# Altium PCB PCB1 - Copy.PcbDoc
Units mil, origin at the board's own origin, x right, y up, seen from the top; angles counter-clockwise.
Board outline 6000 x 4000 mil, 2 copper layers (Top Layer, Bottom Layer); 3 components, 0 nets, 6 pads, 0 vias.
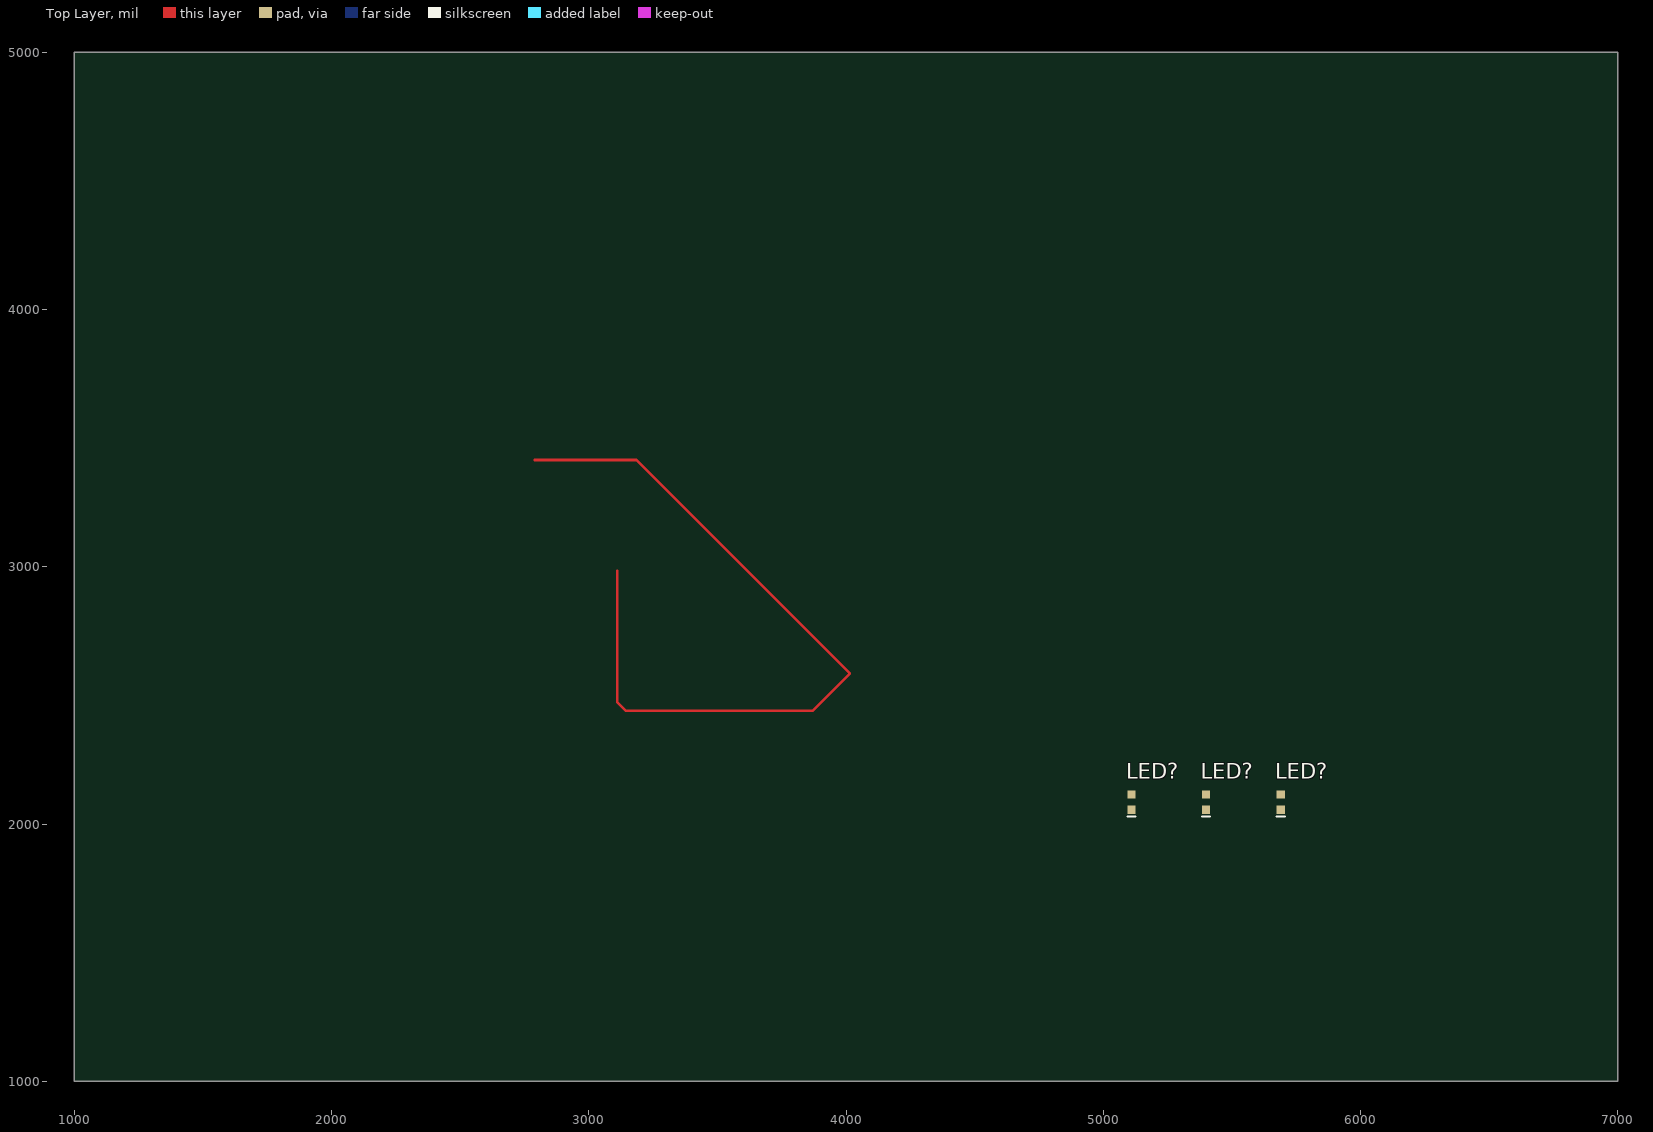
[diagram p0: Top Layer view]
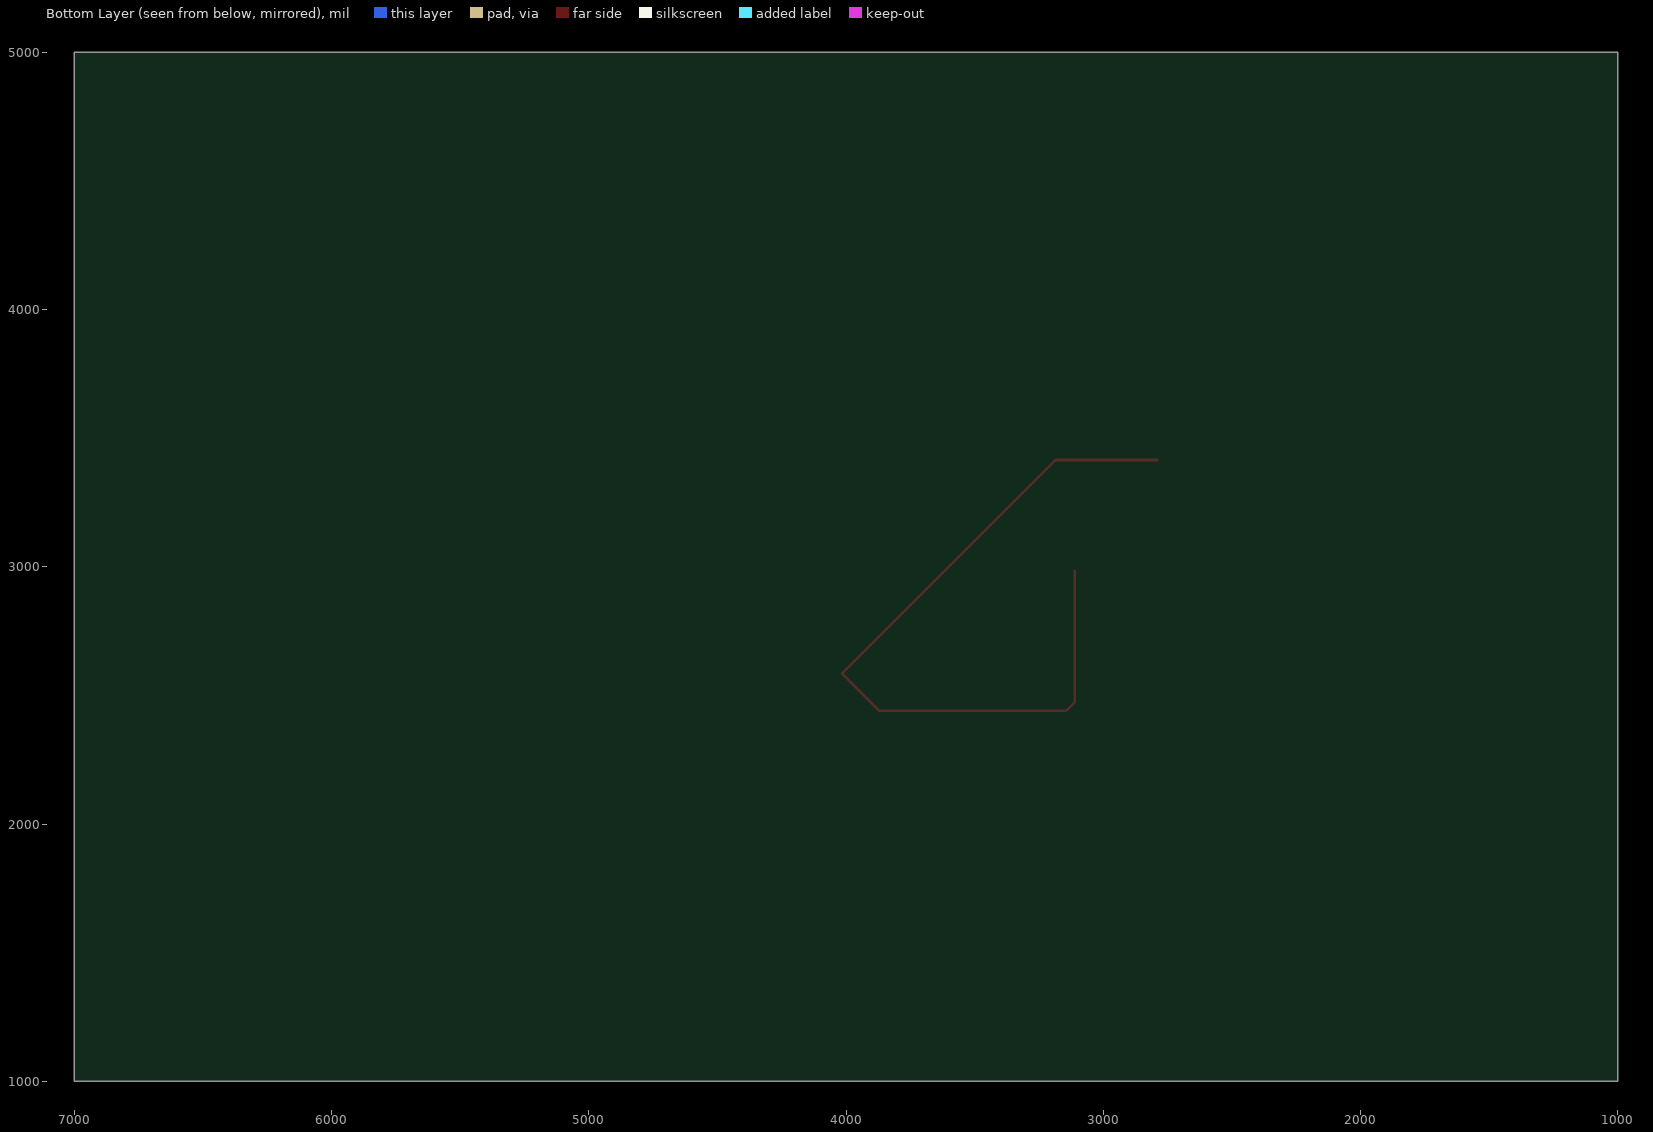
[diagram p1: Bottom Layer view, seen from below]

## Layer stack, top to bottom
Top Solder: solder mask 0.4, Solder Resist, Dk 3.5
Top Layer: signal copper 1.4
Dielectric 1: dielectric 12.6, FR-4, Dk 4.8
Bottom Layer: signal copper 1.4
Bottom Solder: solder mask 0.4, Solder Resist, Dk 3.5

## Board outline
1000,1000 7000,1000 7000,5000 1000,5000

## Design rules (kind name [scope] priority, off if disabled: settings)
Clearance [All] p1: gap=10 ignorepadtopadclearanceinfootprint=FALSE except(0: Arc-Hole Track-Hole SMDPad-Hole THPad-Hole Via-Hole Fill-Hole Poly-Hole Region-Hole Text-Hole)
PolygonConnect [All] p1: connectstyle=Relief reliefconductorwidth=10 reliefentries=4 polygonreliefangle="90 Angle" airgapwidth=10
RoomDefinition Sheet1 [InComponentClass('Sheet1')] p1: confinementstyle=ConfineIn formatcopy=TRUE lockcomponents=FALSE outline 5070,2015 5905,2015 5905,2255 5070,2255
RoutingVias [All] p1: holewidth=28 width=50 viastyle="Through Hole" minholewidth=28 minwidth=50 maxholewidth=28 maxwidth=50
SolderMaskExpansion [All] p1: expansion=4
Width [All] p1: maxlimit=10 minlimit=10 preferedwidth=10
30 further rules are at their usual default settings.

## Classes and differential pairs
component class Sheet1: LED?

## Components (designator, comment, footprint, x,y, rotation, side; value= is the part's Value field where it differs from the comment)
LED? "RED" LED0603_RED_LTST 5690,2085 r90 top
LED? "RED" LED0603_RED_LTST 5400,2085 r90 top
LED? "RED" LED0603_RED_LTST 5110,2085 r90 top

## Footprints (in the part's own frame and the unit in brackets; to place one, negate y for a bottom-side part, rotate by r counter-clockwise, add the part's x,y. Pads: shape width x height; smd on the part's side, far side on the other; paste and mask are expansions set on the pad)
LED0603_RED_LTST [mm] "Chip LED, 2-Leads, Body 1.50x0.80mm, IPC Medium Density"
  rect 0.8x0.8 smd mask+0.05: 1(-0.75,0) 2(0.75,0)
  silkscreen extent -1.4,-0.4 -1.4,0.4, body extent -0.85,-0.45 0.85,0.45, height 0.55

## Part data
LED? LED? LED?: library part E1052, "LED RED CLEAR SMD 2V 0603", OpTemp=-55~85C, Component1LinkDescription=Datasheet, Component1LinkURL=http://optoelectronics.liteon.com/upload/download/DS22-2000-223/LTST-C191KRKT.PDF, Component2LinkDescription="Supplier Part Details", Component2LinkURL=https://www.digikey.com/product-detail/en/lite-on-inc/LTST-C191KRKT/160-1447-1-ND/386836, Component Type=Standard, CreatedBy=SL, CreatedDate=2/19/19, item_category=Diodes, item_category_subtype=LED, KEY=E1052, MaxHeightAboveBoard=0.55mm, MFG1=Lite-On, MFG1PN=LTST-C191KRKT, n=53, PackageReference=0603, Revision=0, Supplier1=Digi-Key, Supplier1PN=160-1447-1-ND, UnitPrice1K=0.056

## Nets (pads, with @x,y where several pads share a name; then routed paths per layer and width w, separated by ;. In a path a pad name is that pad's centre, name@x,y a point inside that pad or via, vN(x,y) a via of type N, cw(c..) or ccw(c..) an arc to the next point about the centre after c; other vN are vias at no path point)
pads on no net: LED?.1 LED?.2
copper on no net: | length 3058.4
  Top Layer w10: 2790,3415 3185,3415 4015,2585 3870,2440 3145,2440 3110,2475 3110,2985